# Altium PCB MainBoard-16.PcbDoc (part 1 of 2)
Units mm, origin at the board's own origin, x right, y up, seen from the top; angles counter-clockwise.
Board outline 115 x 110 mm, 2 copper layers (Top Layer, Bottom Layer); 86 components, 82 nets, 332 pads, 568 vias.
Unrouted connection lines stored in the file: 1.
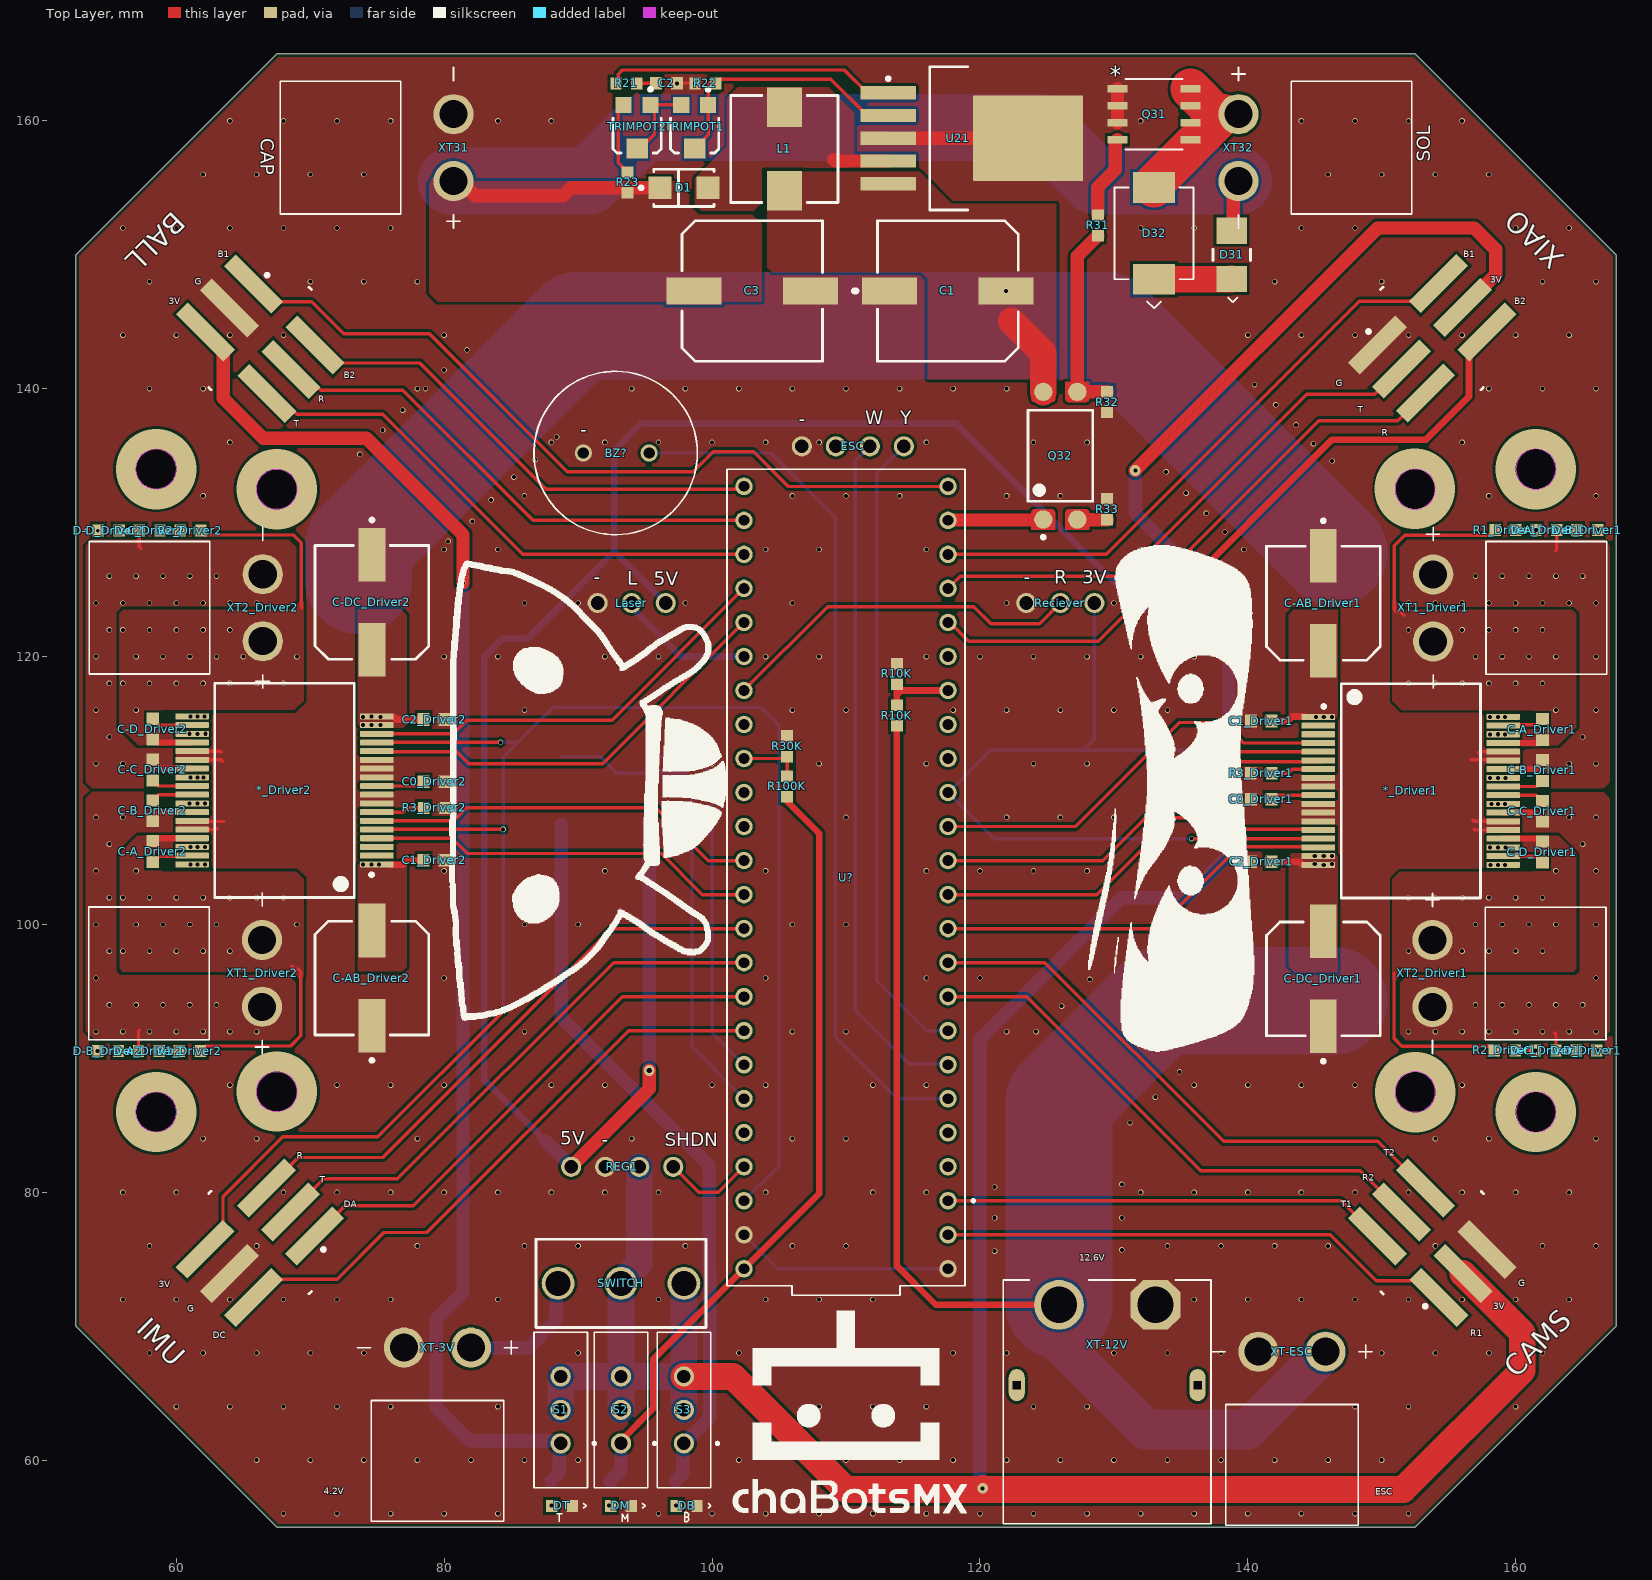
[diagram p0: Top Layer view]
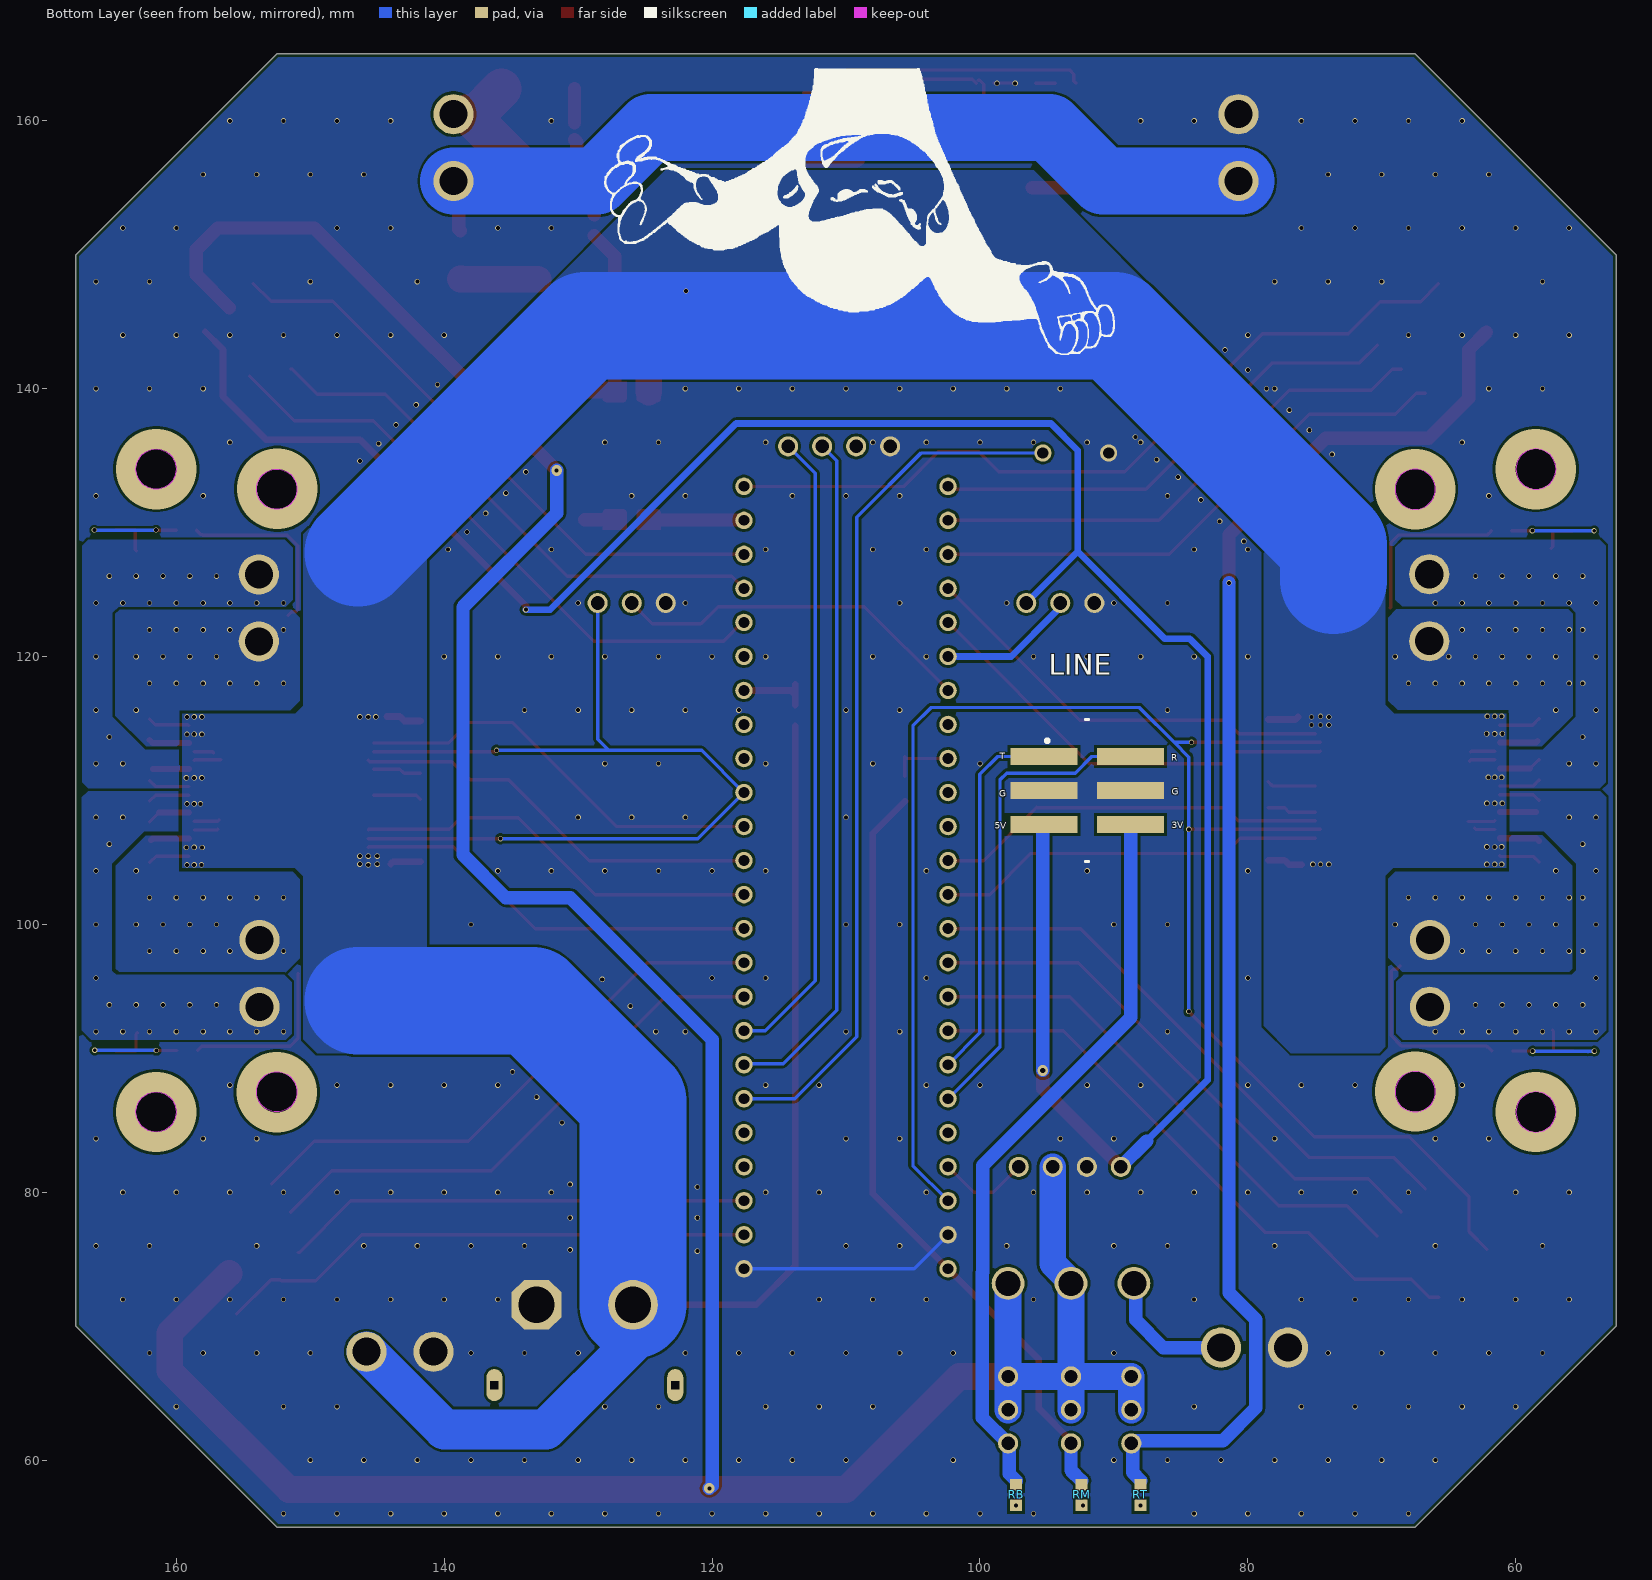
[diagram p1: Bottom Layer view, seen from below]

## Layer stack, top to bottom
Top Solder: solder mask 0.0102, Solder Resist, Dk 3.5
Top Layer: signal copper 0.0356
Dielectric 1: dielectric 0.32, FR-4, Dk 4.8
Bottom Layer: signal copper 0.0356
Bottom Solder: solder mask 0.0102, Solder Resist, Dk 3.5

## Board outline
52.5,70 52.5,150 67.5,165 152.5,165 167.5,150 167.5,70 152.5,55 67.5,55
cut-out: 151,132.5 ccw(c152.5,132.5) 152.5,131 ccw(c152.5,132.5) 154,132.5 ccw(c152.5,132.5) 152.5,134 ccw(c152.5,132.5)
cut-out: 160.015,134 ccw(c161.515,134) 161.515,132.5 ccw(c161.515,134) 163.015,134 ccw(c161.515,134) 161.515,135.5 ccw(c161.515,134)
cut-out: 160.015,86 ccw(c161.515,86) 161.515,84.5 ccw(c161.515,86) 163.015,86 ccw(c161.515,86) 161.515,87.5 ccw(c161.515,86)
cut-out: 151,87.5 ccw(c152.5,87.5) 152.5,86 ccw(c152.5,87.5) 154,87.5 ccw(c152.5,87.5) 152.5,89 ccw(c152.5,87.5)
cut-out: 67.5,131 cw(c67.5,132.5) 66,132.5 cw(c67.5,132.5) 67.5,134 cw(c67.5,132.5) 69,132.5 cw(c67.5,132.5)
cut-out: 58.485,132.5 cw(c58.485,134) 56.985,134 cw(c58.485,134) 58.485,135.5 cw(c58.485,134) 59.985,134 cw(c58.485,134)
cut-out: 67.5,86 cw(c67.5,87.5) 66,87.5 cw(c67.5,87.5) 67.5,89 cw(c67.5,87.5) 69,87.5 cw(c67.5,87.5)
cut-out: 58.485,84.5 cw(c58.485,86) 56.985,86 cw(c58.485,86) 58.485,87.5 cw(c58.485,86) 59.985,86 cw(c58.485,86)

## Design rules (kind name [scope] priority, off if disabled: settings)
BoardOutlineClearance [All] p1: gap=0.254 ignorepadtopadclearanceinfootprint=FALSE except(0: Arc-SplitContinuation Track-SplitContinuation SMDPad-SplitContinuation THPad-SplitContinuation Via-SplitContinuation Fill-SplitContinuation Poly-SplitContinuation Region-SplitContinuation Text-SplitContinuation)
Clearance [All] p1: gap=0.2 ignorepadtopadclearanceinfootprint=TRUE
PolygonConnect [All] p1: connectstyle=Direct reliefconductorwidth=0.254 reliefentries=4 polygonreliefangle="90 Angle" airgapwidth=0.254
RoomDefinition Driver2 [InComponentClass('Driver2')] p1: confinementstyle=ConfineIn formatcopy=TRUE lockcomponents=FALSE outline 80.775,130.6 52.953,130.6 52.953,89.336 80.775,89.336
RoomDefinition Driver1 [InComponentClass('Driver1')] p2: confinementstyle=ConfineIn formatcopy=TRUE lockcomponents=FALSE outline 139.475,89.388 167.291,89.388 167.291,130.653 139.475,130.653
RoutingVias [All] p1: holewidth=0.711 width=1.27 viastyle="Through Hole" minholewidth=0.711 minwidth=1.27 maxholewidth=0.711 maxwidth=1.27
SolderMaskExpansion [All] p1: expansion=0.102 istentingtop=FALSE
SupplyNets "Schematic Supply Nets_11" [InNet('TOP+3V')] p1: voltage=0.000
SupplyNets "Schematic Supply Nets_10" [InNet('BOT+3V')] p2: voltage=0.000
SupplyNets "Schematic Supply Nets_7" [InNet('+5V')] p3: voltage=0.000
SupplyNets "Schematic Supply Nets_3" [InNet('+4.2V')] p4: voltage=0.000
SupplyNets "Schematic Supply Nets_6" [InNet('MID+3V')] p5: voltage=0.000
SupplyNets "Schematic Supply Nets_5" [InNet('+3VB')] p6: voltage=0.000
SupplyNets "Schematic Supply Nets_4" [InNet('+48V')] p7: voltage=0.000
SupplyNets "Schematic Supply Nets_2" [InNet('+3V3')] p8: voltage=0.000
SupplyNets "Schematic Supply Nets_1" [InNet('GND')] p9: voltage=0.000
SupplyNets "Schematic Supply Nets" [InNet('+12V')] p10: voltage=0.000
Width [All] p1: maxlimit=10 minlimit=0.254 preferedwidth=0.254
30 further rules are at their usual default settings.

## Classes and differential pairs
component class U_OptocouplerKicker: D31 D32 Q31 Q32 R31 R32 R33 XT31 XT32
net class PWM-D[1..2]: PWM-D1 PWM-D2
net class PWM-C[1..2]: PWM-C1 PWM-C2
net class PWM-B[1..2]: PWM-B1 PWM-B2
net class PWM-A[1..2]: PWM-A1 PWM-A2
component class Main: BALL BZ? CAMS DB DM DT ESC IMU Laser LINE R10K R30K R100K RB Reciever REG1 RM RT S1 S2 S3 SWITCH U? XIAO XT-3V XT-12V XT-ESC
component class U_VoltageBooster48V: C1 C2 C3 D1 L1 R21 R22 R23 TRIMPOT1 TRIMPOT2 U21
channel class DRV8432SchDoc: Driver1 Driver2
component class Driver2: *_Driver2 C1_Driver2 C2_Driver2 C-A_Driver2 C-AB_Driver2 C-B_Driver2 C-C_Driver2 C-D_Driver2 C-DC_Driver2 D-A_Driver2 D-B_Driver2 D-C_Driver2 D-D_Driver2 R1_Driver2 R2_Driver2 R3_Driver2 XT1_Driver2 XT2_Driver2
component class Driver1: *_Driver1 C0_Driver1 C1_Driver1 C2_Driver1 C-A_Driver1 C-AB_Driver1 C-B_Driver1 C-C_Driver1 C-D_Driver1 C-DC_Driver1 D-A_Driver1 D-B_Driver1 D-C_Driver1 D-D_Driver1 R1_Driver1 R2_Driver1 R3_Driver1 XT1_Driver1 XT2_Driver1

## Components (designator, comment, footprint, x,y, rotation, side; value= is the part's Value field where it differs from the comment)
*_Driver1 "DRV8432" DRV8432 152.171,109.976 r0 top (schematic designator *)
*_Driver2 "DRV8432" DRV8432 68.073,110.012 r180 top (schematic designator *)
BALL "IDC-6PIN-SMT-2.54_1_1" IDC-6PIN-SMT-2.54 66.25,143.75 r315 top
BZ? "BUZZER-PS1240P02BT" BUZZER-PS1240P02BT 92.8,135.2 r180 top
C0_Driver1 "1UF" CAP_0603 141,109.338 r180 top (schematic designator C0)
C0_Driver2 "1UF" CAP_0603 79.245,110.65 r0 top (schematic designator C0)
C1 "EEE-HD1V101AP" FP-HDG-MFG 117.6,147.3 r0 top
C1_Driver1 "1UF" CAP_0603 141,115.188 r0 top (schematic designator C1)
C1_Driver2 "1UF" CAP_0603 79.245,104.8 r180 top (schematic designator C1)
C2 "1UF" CAP_0603 96.6,162.8 r180 top
C2_Driver1 "1UF" CAP_0603 141,104.688 r0 top (schematic designator C2)
C2_Driver2 "1UF" CAP_0603 79.245,115.3 r180 top (schematic designator C2)
C3 "EEE-TG1J101UP" FP-TGG-MFG 103,147.3 r180 top
C-A_Driver1 "1UF" CAP_0603 162,114.548 r270 top (schematic designator C-A)
C-A_Driver2 "1UF" CAP_0603 58.245,105.44 r90 top (schematic designator C-A)
C-AB_Driver1 "EEEFT1E471AP" FP-FTF-MFG 145.641,123.988 r270 top (schematic designator C-AB)
C-AB_Driver2 "EEEFT1E471AP" FP-FTF-MFG 74.603,96 r90 top (schematic designator C-AB)
C-B_Driver1 "1UF" CAP_0603 162,111.5 r90 top (schematic designator C-B)
C-B_Driver2 "1UF" CAP_0603 58.245,108.488 r270 top (schematic designator C-B)
C-C_Driver1 "1UF" CAP_0603 162,108.452 r270 top (schematic designator C-C)
C-C_Driver2 "1UF" CAP_0603 58.245,111.536 r90 top (schematic designator C-C)
C-D_Driver1 "1UF" CAP_0603 162,105.404 r90 top (schematic designator C-D)
C-D_Driver2 "1UF" CAP_0603 58.245,114.584 r270 top (schematic designator C-D)
C-DC_Driver1 "EEEFT1E471AP" FP-FTF-MFG 145.641,95.938 r90 top (schematic designator C-DC)
C-DC_Driver2 "EEEFT1E471AP" FP-FTF-MFG 74.603,124.05 r270 top (schematic designator C-DC)
CAMS "IDC-6PIN-SMT-2.54_1_1" IDC-6PIN-SMT-2.54 153.776,76.224 r135 top
D1 "SS14-E3/61T" FP-95400-MFG 97.9,155 r0 top
D31 "DIO_BZG05C3V3" DIO_BZG05C3V3 138.8,150 r270 top
D32 "DIO_RS3B-13-F" DIO_RS3B-13-F 133.2,152 r270 top
D-A_Driver1 "LED_0603" LED_0603 162.291,129.438 r180 top (schematic designator D-A)
D-A_Driver2 "LED_0603" LED_0603 57.953,90.55 r0 top (schematic designator D-A)
D-B_Driver1 "LED_0603" LED_0603 165.341,129.438 r180 top (schematic designator D-B)
D-B_Driver2 "LED_0603" LED_0603 54.903,90.55 r0 top (schematic designator D-B)
D-C_Driver1 "LED_0603" LED_0603 162.241,90.588 r0 top (schematic designator D-C)
D-C_Driver2 "LED_0603" LED_0603 58.003,129.4 r180 top (schematic designator D-C)
D-D_Driver1 "LED_0603" LED_0603 165.291,90.588 r0 top (schematic designator D-D)
D-D_Driver2 "LED_0603" LED_0603 54.953,129.4 r180 top (schematic designator D-D)
DB "LED_0603" LED_0603 98.1,56.6 r0 top
DM "LED_0603" LED_0603 93.2,56.6 r0 top
DT "LED_0603" LED_0603 88.8,56.6 r0 top
ESC "4PIN" 4PIN 110.5,135.7 r180 top
IMU "IDC-6PIN-SMT-2.54_1_1" IDC-6PIN-SMT-2.54 66.25,76.25 r225 top
L1 "100UH" IND_Boost 105.4,157.9 r90 top
Laser "3PIN" 3PIN 94,124 r180 top
LINE "IDC-6PIN-SMT-2.54_1_1" IDC-6PIN-SMT-2.54 92,110 r180 bottom
Q31 "SQ4470EY-T1_GE3" SQ4470EY-T1_GE3 133,160.5 r0 top
Q32 "SFH6156-1T" FP-83911-MFG 126,135 r90 top
R1_Driver1 "4.7KΩ" RES_0603 159.241,129.438 r180 top (schematic designator R1)
R1_Driver2 "4.7KΩ" RES_0603 61.003,90.55 r0 top (schematic designator R1)
R2_Driver1 "4.7KΩ" RES_0603 159.191,90.588 r0 top (schematic designator R2)
R2_Driver2 "4.7KΩ" RES_0603 61.053,129.4 r180 top (schematic designator R2)
R3_Driver1 "10KΩ" RES_0603 141,111.288 r180 top (schematic designator R3)
R3_Driver2 "10KΩ" RES_0603 79.245,108.7 r0 top (schematic designator R3)
R10K "10KΩ" RES_0603 113.8,115.6 r90 top
R10K "10KΩ" RES_0603 113.8,118.7 r90 top
R21 "2.94KΩ" RES_0603 93.6,162.8 r180 top
R22 "1.5KΩ" RES_0603 99.5,162.8 r0 top
R23 "30KΩ" RES_0603 93.7,155.4 r270 top
R30K "10KΩ" RES_0603 105.6,113.3 r90 top
R31 "10KΩ" RES_0603 128.8,152.2 r90 top
R32 "10KΩ" RES_0603 129.5,139 r90 top
R33 "1KΩ" RES_0603 129.5,131 r270 top
R100K "10KΩ" RES_0603 105.6,110.3 r90 top
RB "110Ω" RES_0603 97.3,57.4 r270 bottom
Reciever "3PIN" 3PIN 126,124 r180 top
REG1 "U1V11F5" U1V11F5 93.28,81.9 r180 top
RM "110Ω" RES_0603 92.4,57.4 r270 bottom
RT "110Ω" RES_0603 88,57.4 r270 bottom
S1 "EG1218" EG1218 88.65,63.75 r90 top
S2 "EG1218" EG1218 93.15,63.75 r90 top
S3 "EG1218" EG1218 97.85,63.75 r90 top
SWITCH "Slide Switch 6A" "Slide Switch 6A" 93.2,73.2 r90 top
TRIMPOT1 "TC33X-2-103E" BOUR-TC33X-2_V 98.7,159.4 r270 top
TRIMPOT2 "TC33X-2-103E" BOUR-TC33X-2_V 94.4,159.4 r270 top
U21 "LM2587SX-ADJ/NOPB" KTT0005B_N 119.4,158.7 r0 top
U? "Teensy-4.1-TH" Teensy-4.1-TH 110,103.5 r90 top
XIAO "IDC-6PIN-SMT-2.54_1_1" IDC-6PIN-SMT-2.54 153.75,143.75 r45 top
XT1_Driver1 "XT30_PW_M" XT30_PW_M 163.841,123.638 r270 top (schematic designator XT1)
XT1_Driver2 "XT30_PW_M" XT30_PW_M 56.403,96.35 r90 top (schematic designator XT1)
XT2_Driver1 "XT30_PW_M" XT30_PW_M 163.791,96.338 r270 top (schematic designator XT2)
XT2_Driver2 "XT30_PW_M" XT30_PW_M 56.453,123.65 r90 top (schematic designator XT2)
XT31 "CAPACITOR" XT30_PW_M 70.7,158 r90 top
XT32 "SOLENOID" XT30_PW_M 149.3,158 r270 top
XT-3V "XT30_PW_M" XT30_PW_M 79.5,58.4 r180 top
XT-12V "XT60PW" XT60PW 129.5,65.6 r0 top
XT-ESC "XT30_PW_M" XT30_PW_M 143.3,58.1 r180 top

## Footprints (in the part's own frame and the unit in brackets; to place one, negate y for a bottom-side part, rotate by r counter-clockwise, add the part's x,y. Pads: shape width x height; smd on the part's side, far side on the other; paste and mask are expansions set on the pad)
3PIN [mm]
  round 1.5 hole 1.02: 1(-2.54,0) 2(0,0) 3(2.54,0)
4PIN [mm]
  round 1.5 hole 1.02: 1(-3.82,0) 2(-1.28,0) 3(1.26,0) 4(3.8,0)
BOUR-TC33X-2_V [mm] "SMD, 3-Leads, Body 3.8x3.6mm"
  rect 1.2x1.2 smd: 1(-1.8,1) 3(-1.8,-1)
  rect 1.5x1.6 smd: 2(1.45,0)
  silkscreen extent -3.07,-1.8 1.8,1.8, body extent -2,-1.8 1.96,1.8, height 1.15
BUZZER-PS1240P02BT [mm]
  round 1.28 hole 0.85: 1(-2.5,0) 2(2.413,0)
  silkscreen extent -6.1,-6.1 6.1,6.1, body extent -6.14,-6.04 6.06,6.16, height 6
CAP_0603 [mm] "Chip Capacitor, 2-Leads, Body 1.60x0.80mm, IPC Medium Density"
  rect 0.9x0.95 smd: 1(-0.775,0) 2(0.775,0)
  body extent -0.85,-0.45 0.85,0.45, height 0.55
DIO_BZG05C3V3 [mm] "Molded Diode, 2-Leads, Body 4.35x2.50mm, IPC Medium Density"
  rect 1.95x2.25 smd: A(-1.8,0) C(1.8,0)
  silkscreen extent -0.42,-1.4 3.54,1.4, body extent -2.25,-1.4 2.25,1.4, height 2.3
DIO_RS3B-13-F [mm]
  rect 2.29x3.12 smd: A(-3.03,-0.2) C(3.83,-0.2)
  silkscreen extent -3.03,-3.15 6,2.75, body extent -3.67,-3.31 4.46,2.91, height 2.45
DRV8432 [mm]
  rrect22% 2.5x0.45 smd: 1(-6.9,5.525) 2(-6.9,4.875) 3(-6.9,4.225) 4(-6.9,3.575) 5(-6.9,2.925) 6(-6.9,2.275) 7(-6.9,1.625) 8(-6.9,0.975) 9(-6.9,0.325) 10(-6.9,-0.325) 11(-6.9,-0.975) 12(-6.9,-1.625) 13(-6.9,-2.275) 14(-6.9,-2.925) 15(-6.9,-3.575) 16(-6.9,-4.225) 17(-6.9,-4.875) 18(-6.9,-5.525) 19(6.9,-5.525) 20(6.9,-4.875) 21(6.9,-4.225) 22(6.9,-3.575) 23(6.9,-2.925) 24(6.9,-2.275) 25(6.9,-1.625) 26(6.9,-0.975) 27(6.9,-0.325) 28(6.9,0.325) 29(6.9,0.975) 30(6.9,1.625) 31(6.9,2.275) 32(6.9,2.925) 33(6.9,3.575) 34(6.9,4.225) 35(6.9,4.875) 36(6.9,5.525)
  silkscreen extent -6.62,-8 5.2,8, body extent -7.1,-7.95 7.1,7.95, height 3.6
EG1218 [mm]
  round 1.508 hole 1: 1(-2.5,-0.05) 2(0,-0.05) 3(2.5,-0.05)
  silkscreen extent -5.8,-2.65 5.8,1.95, body extent -5.8,-2.05 5.8,1.95, height 7
FP-83911-MFG [mm]
  round 1.368 smd paste+0 mask+0: 1(-4.765,1.27) 2(-4.765,-1.27) 3(4.765,-1.27) 4(4.765,1.27)
  Top Layer region: 5.525,0.38 4.255,0.38 4.159,0.399 4.078,0.453 4.024,0.534 4.005,0.63 4.005,0.63 4.005,1.91 4.024,2.006 4.078,2.087 4.159,2.141 4.255,2.16 4.255,2.16 5.525,2.16
  Top Layer region: -5.525,2.16 -4.255,2.16 -4.159,2.141 -4.078,2.087 -4.024,2.006 -4.005,1.91 -4.005,1.91 -4.005,0.63 -4.038,0.505 -4.13,0.413 -4.255,0.38 -4.255,0.38 -5.525,0.38
  Top Layer region: -5.525,-0.38 -4.255,-0.38 -4.159,-0.399 -4.078,-0.453 -4.024,-0.534 -4.005,-0.63 -4.005,-0.63 -4.005,-1.91 -4.024,-2.006 -4.078,-2.087 -4.159,-2.141 -4.255,-2.16 -4.255,-2.16 -5.525,-2.16
  Top Layer region: 5.525,-2.16 4.255,-2.16 4.159,-2.141 4.078,-2.087 4.024,-2.006 4.005,-1.91 4.005,-1.91 4.005,-0.63 4.024,-0.534 4.078,-0.453 4.159,-0.399 4.255,-0.38 4.255,-0.38 5.525,-0.38
  silkscreen extent -6.2,-2.41 3.4,2.41, body extent -4.91,-2.34 4.91,2.34, height 4.06
FP-95400-MFG [mm]
  rect 1.7x1.68 smd paste+0 mask+0: 1(-1.79,0) 2(1.79,0)
  silkscreen extent -3.32,-1.4 2.25,1.4, body extent -2.74,-1.5 2.74,1.5, height 0.25
FP-FTF-MFG [mm]
  rect 4x2 smd paste+0 mask+0: 1(-3.55,0) 2(3.55,0)
  silkscreen extent -6.27,-4.25 4.25,4.25, body extent -5.8,-4.5 5.8,4.5, height 0.25
FP-HDG-MFG [mm]
  rect 4.1x2 smd paste+0 mask+0: 1(-4.35,0) 2(4.35,0)
  silkscreen extent -7.1,-5.25 5.25,5.25, body extent -6.65,-5.5 6.65,5.5, height 0.25
FP-TGG-MFG [mm]
  rect 4.1x2 smd paste+0 mask+0: 1(-4.35,0) 2(4.35,0)
  silkscreen extent -7.88,-5.25 5.25,5.25, body extent -6.65,-5.5 6.65,5.5, height 0.25
IDC-6PIN-SMT-2.54 [mm] "SOJ, 6-Leads, Body 10.60x10.50mm, Pitch 2.54mm, IPC Low Density"
  rect 5x1.25 smd: 1(-3.225,2.54) 2(-3.225,0) 3(-3.225,-2.54) 4(3.25,-2.54) 5(3.25,0) 6(3.25,2.54)
  silkscreen extent -3.1,-5.3 0.12,5.3, body extent -5.1,-7.61 5.08,7.61, height 10.5
IND_Boost [mm] "Precision Wire Wound Inductor, 2-Leads, Body 7.75x7.75mm, IPC Medium Density"
  rect 2.95x2.6 smd: 1(-3.1,0) 2(3.1,0)
  silkscreen extent -4,-4 4,4, body extent -3.98,-3.88 3.98,3.88, height 4.6
KTT0005B_N [mm] "DPAK, 5-Leads, Body 10.65x9.65mm, Pitch 1.7mm, IPC Medium Density"
  rrect10% 4.15x1 smd: 1(-6.25,3.4) 2(-6.25,1.7) 3(-6.25,0) 4(-6.25,-1.7) 5(-6.25,-3.4)
  rrect2% 8.2x6.4 smd: 6(4.2,0)
  silkscreen extent -6.37,-5.35 -0.3,5.35, body extent -3.15,-5.32 6.5,5.33, height 4.83
LED_0603 [mm]
  rect 0.85x0.9 smd: A(-0.776,-0.009) C(0.774,-0.009)
  silkscreen extent 1.6,-0.2 1.8,0.2, body extent -0.8,-0.4 0.8,0.4, height 0.35
RES_0603 [mm] "Chip Resistor, 2-Leads, Body 1.60x0.80mm, IPC Medium Density"
  rect 0.85x0.9 smd: 1(-0.775,0) 2(0.775,0)
  body extent -0.85,-0.45 0.85,0.45, height 0.55
"Slide Switch 6A" [mm]
  round 2.45 hole 1.85: 1(0,4.7) 2(0,0) 3(0,-4.7)
  silkscreen extent -3.3,-6.35 3.3,6.35, body extent -3.3,-6.35 3.3,6.35, height 13.33
SQ4470EY-T1_GE3 [mil]
  rect 57.5x22 smd paste+0 mask+0: D(107.17,-75.43) D(107.17,-25.43) D(107.17,24.57) D(107.17,74.57) G(-107.33,-75.43) S(-107.33,-25.43) S(-107.33,24.57) S(-107.33,74.57)
  silkscreen extent -84,-104 83,103, body extent -122,-99 122,98, height 69
Teensy-4.1-TH [mm]
  round 1.308 hole 0.8: 0(-26.67,-7.62) 1(-24.13,-7.62) 2(-21.59,-7.62) 3(-19.05,-7.62) 3V(-24.13,7.62) 3V-1(6.35,-7.62) 4(-16.51,-7.62) 5(-13.97,-7.62) 6(-11.43,-7.62) 7(-8.89,-7.62) 8(-6.35,-7.62) 9(-3.81,-7.62) 10(-1.27,-7.62) 11(1.27,-7.62) 12(3.81,-7.62) 13(3.81,7.62) 14(1.27,7.62) 15(-1.27,7.62) 16(-3.81,7.62) 17(-6.35,7.62) 18(-8.89,7.62) 19(-11.43,7.62) 20(-13.97,7.62) 21(-16.51,7.62) 22(-19.05,7.62) 23(-21.59,7.62) 24(8.89,-7.62) 25(11.43,-7.62) 26(13.97,-7.62) 27(16.51,-7.62) 28(19.05,-7.62) 29(21.59,-7.62) 30(24.13,-7.62) 31(26.67,-7.62) 32(29.21,-7.62) 33(29.21,7.62) 34(26.67,7.62) 35(24.13,7.62) 36(21.59,7.62) 37(19.05,7.62) 38(16.51,7.62) 39(13.97,7.62) 40(11.43,7.62) 41(8.89,7.62) GND(-26.67,7.62) GND1(-29.21,-7.62) GND3(6.35,7.62) VIN(-29.21,7.62)
  silkscreen extent -31.18,-9.6 30.48,8.89, body extent -31.7,-8.9 30.73,8.88, height 15.02
U1V11F5 [mm]
  round 1.5 hole 1.02: GND(1.26,0) SHDN(-3.82,0) VIN(-1.28,0) VOUT(3.8,0)
  body extent -5.78,-1.34 5.68,4.95, height 18.12
XT30_PW_M [mm]
  round 3 hole 2.1: N(2.5,-10) P(-2.5,-10)
  silkscreen extent -6,-10.5 6,2.95, body extent -4.95,-11 4.95,2.95, height 5
XT60PW [mm]
  oct 3.716x3.716 hole 2.7 mask+0.102: N(3.6,6)
  round 3.716 hole 2.7 mask+0.102: P(-3.6,6)
  oval 1.2x2.4 hole 0.6 square mask+0.102: SH1(-6.75,0) SH2(6.75,0)
  silkscreen extent -7.75,-10.35 7.75,7.85, body extent -7.75,-10.35 7.75,7.85, height 8.4

## Part data
C0_Driver1 C0_Driver2 C1_Driver1 C1_Driver2 C2 C2_Driver1 C2_Driver2 C-A_Driver1 C-A_Driver2 C-B_Driver1 C-B_Driver2 C-C_Driver1 C-C_Driver2 C-D_Driver1 C-D_Driver2: library part CAP_0603, "Capacitor SMD 0603 generic"
C1: library part CMP-00287-42869300-1, "EEE-HD1V101AP Aluminum Electrolytic Capacitor, 100 uF, 35 V, ± 20%, 5000 hours @ 105°C, Radial Can - SMD", Capacitance=100µF, Case/Package=Radial, Dielectric Material=Aluminium, ESR (Equivalent Series Resistance)=800mΩ, Leakage Current=35µA, Max Operating Temperature=105°C, Min Operating Temperature=-40°C, Ripple Current=101mA, Tolerance=20%, Voltage=35V, Diameter=10mm, Dissipation Factor=14%, Height=10.2mm, Height - Seated (Max)=10.2108mm, Impedance=800mΩ, Lead Free="Lead Free", Lead Pitch=4.6mm, Length=10.5mm, Life (Hours)=5000hours, Lifecycle Status=Production, Mount="PCB, Surface Mount", NexarPartId=42869300, Number of Pins=2, Packaging="Cut Tape", Radiation Hardening=No, REACH SVHC="No SVHC", Ripple Current (AC)=101mA, RoHS=Compliant, Schedule B="8532220020, 8532220020", Termination=SMD/SMT, Voltage Rating=35V, Voltage Rating (DC)=35V
C3: library part CMP-05427-002169-1, "CAP ALUM 100UF 20% 63V SMD", Capacitance=100uF, Case/Package=Radial, ESR (Equivalent Series Resistance)=800mR, Max Operating Temperature=125°C, Min Operating Temperature=-40°C, Package Quantity=500, Ratings=AEC-Q200, Ripple Current=150mA, Tolerance=20%, Voltage=63V, Construction=Cylindrical, Contact Plating=Tin, Diameter=10mm, Dissipation Factor=0.12%, Height=10.2mm, Height - Seated (Max)=0.402inch, Lead Free="Lead Free", Length=10.2mm, Life (Hours)=2000Hour, Mount="Surface Mount", Packaging="Tape and Reel", Radiation Hardening=No, Reach SVHC Compliant=Yes, Ripple Current (AC)=150mA, RoHS Compliant=Yes, Series=TG, Termination=SMD/SMT, Voltage Rating=63V, Voltage Rating (DC)=63V, Width=900um
C-AB_Driver1 C-AB_Driver2 C-DC_Driver1 C-DC_Driver2: library part CMP-05427-000040-1, "CAP ALUM 470UF 20% 25V SMD", Capacitance=470uF, Case/Package=Radial, Dielectric Material=Aluminium, ESR (Equivalent Series Resistance)=80mR, Leakage Current=117.5uA, Max Operating Temperature=105°C, Min Operating Temperature=-55°C, Package Quantity=500, Ripple Current=850mA, Tolerance=20%, Voltage=25V, Construction=Cylindrical, Contact Plating=Tin, Diameter=8mm, Features="General Purpose", Height=10.2mm, Height - Seated (Max)=0.413inch, Lead Diameter=0.9mm, Lead Free="Lead Free", Lead Pitch=3.1mm, Length=10.2mm, Life (Hours)=2000Hour, Mount="Surface Mount", Number of Pins=2, Packaging="Tape and Reel", Radiation Hardening=No, REACH SVHC="No SVHC", Ripple Current (AC)=850mA, RoHS Compliant=Yes, Series=FT, Termination=SMD/SMT, Voltage Rating=25V, Voltage Rating (DC)=25V
D1: library part CMP-02539-000035-1, "DIODE SCHOTTKY 40V 1A DO214AC", Forward Current=1A, Manufacturer=Vishay, Max Junction Temp=+150°C, Max Repetitive Reverse Voltage=40V, Max Surge Forward Current=40A, Package=95400, Peak Reverse Current=0.2mA, Temperature="-65°C to +150°C", Temperature Range Low=-65°C, Automotive=No, Category=Diode, ComponentLink2Description=Datasheet, ComponentLink2URL=http://www.vishay.com/docs/88746/ss12.pdf, Device Class L1="Discrete Semiconductors", Device Class L2=Diodes, Device Class L3="Schottky Diodes", Digikey Description="DIODE SCHOTTKY 40V 1A DO214AC", Footprint Url=http://www.vishay.com/docs/95400/sma.pdf, Height=2.29mm, Lead Free=Yes, Manufacturer Part Number=SS14-E3/61T, Mouser Description="SS14 Series 40 V 1 A Surface Mount Schottky Barrier Rectifier - DO-214AC (SMA)", Octopart=https://octopart.com/ss14-e3%2F61t-vishay-39552847, RoHS=TRUE, Standoff Height=0mm, Temperature Range High=+150°C
ESC Laser Reciever: "2.54 Header"
L1: library part "Boost Inductor", "Voltage Boost Inductor"
Q32: library part CMP-00030-03895371-1, "SFH6156-1T Optocoupler Dc-in 1-CH Transistor Dc-out 4-PIN PDIP SMD T/r", Ambient Temperature Range High=100°C, Case/Package=SMD/SMT, Collector Emitter Saturation Voltage=400mV, Collector Emitter Voltage (VCEO)=70V, Current Transfer Ratio=80%, Forward Current=60mA, Forward Voltage=1.25V, Isolation Voltage=5.3kV, Max Collector Current=100mA, Max Power Dissipation=150mW, Min Operating Temperature=-55°C, Output Current per Channel=50mA, Reverse Breakdown Voltage=6V, Fall Time=11s, Height=4.059mm, Input Current=60mA, Lead Free="Lead Free", Max Input Current=60mA, Max Operating Temperature=100°C, Max Output Voltage=70V, Mount="PCB, Surface Mount", NexarPartId=3895371, Number of Channels=1, Number of Elements=1, Number of Pins=4, Output Voltage=70V, Packaging=Digi-Reel®, Power Dissipation=150mW, Radiation Hardening=No, Reverse Voltage=6V, Rise Time=2s, RoHS=Compliant, Schedule B="8541408000, 8541408000", Turn-Off Delay Time=2.3µs, Turn-On Delay Time=3µs
R1_Driver1 R1_Driver2 R2_Driver1 R2_Driver2 R3_Driver1 R3_Driver2 R10K R10K R21 R22 R23 R30K R31 R32 R33 R100K RB RM RT: library part RES_0603, "Resistor SMD 0603 generic"
TRIMPOT1 TRIMPOT2: library part CMP-2100-03695-1, "Trimming Potentiometer, 10000 Ohm, -40 to 100 degC, 3-Pin SMD, RoHS, Tape and Reel", Case/Package=SMD/SMT, Colour=Silver, Manufacturer=Bourns, Max Operating Temperature=100degC, Max Power Dissipation=100mW, Min Operating Temperature=-40degC, Package Description="3-Pin Surface Mount Device, Body 3.8 x 3.6 mm", Package Quantity=2500, Package Reference=TC33X-2, Resistance=10KOhm, Temperature Coefficient=250ppm/degreesC, Tolerance=25%, Voltage Rating (DC)=50V, Composition=Potentiometer, Contact Plating=Silver, Datasheet URL=http://www.bourns.com/docs/Product-Datasheets/TC33.pdf, Datasheet Version=42583.0, Depth=3.8mm, Height=0.047inch, Lead Free=LeadFree, Length=3mm, Manufacturer URL=http://www.bourns.com/, Military Standard=Not, Mount=SurfaceMount, Number of Turns=1, Packaging=TapeandReel, Power Rating=100mW, Radiation Hardening=No, REACH SVHC=NoSVHC, RoHSCompliant=true, Taper=Linear, Termination=FootPrint, Weight=29.4mg, Width=0.118inch
U21: library part CMP-0069-00069-3, "5A Flyback Regulator, 5-pin TO-263, Pb-Free", Manufacturer="Texas Instruments", PackageTopMarking="NSUZXYTTE#*LM2587S*-ADJ P+", PowerWise=N, Code_JEDEC=MO-169-AB, ComponentLink1Description="Datasheet URL", ComponentLink1URL=http://www.ti.com/general/docs/lit/getliterature.tsp?genericPartNumber=LM2587&fileType=pdf, CompType=Switcher, PackageDescription="TO-263, Molded, .400 x .390 x .180in, 5 Lead, .067in Pitch, Surface Mount", PackageReference=KTT0005B, PinCount=5, RoHS=Y
XT31 XT32: library part XT30_PW_M

## Via types
v1: diameter 0.4, hole 0.3, Top Layer to Bottom Layer, tented both sides, 552 vias
v2: diameter 6, hole 3, Top Layer to Bottom Layer, 8 vias
v3: diameter 0.5, hole 0.3, Top Layer to Bottom Layer, 3 vias
v4: diameter 0.4, hole 0.256, Top Layer to Bottom Layer, tented both sides, 2 vias
v5: diameter 0.8, hole 0.3, Top Layer to Bottom Layer, tented both sides, 2 vias
v6: diameter 0.8, hole 0.4, Top Layer to Bottom Layer, tented both sides, 1 vias

## Nets (pads, with @x,y where several pads share a name; then routed paths per layer and width w, separated by ;. In a path a pad name is that pad's centre, name@x,y a point inside that pad or via, vN(x,y) a via of type N, cw(c..) or ccw(c..) an arc to the next point about the centre after c; other vN are vias at no path point)
4IN: R30K.1 R100K.2 U?.41 | length 4.7
  Top Layer w0.254: U?.41@102.38,112.39 105.465,112.39 R30K.1@105.6,112.525 R100K.2@105.6,111.075
12IN: R10K.1@113.8,117.925 R10K.2@113.8,116.375 U?.26 | length 5.5
  Top Layer w0.5: R10K.2@113.8,116.375 113.8,117.15 ; R10K.1@113.8,117.925 113.8,117.15 ; U?.26@117.62,117.47 114.12,117.47 113.8,117.15
+3V3: *_Driver1.5 *_Driver1.15 *_Driver2.5 *_Driver2.15 IMU.4 Reciever.1 U?.3V U?.3V-1 | length 200
  Top Layer w0.254: IMU.4@62.156,75.748 63.482,77.074 63.482,79.682 67.944,84.144 75.044,84.144 v1(84.4,93.5) ; *_Driver2.5@74.58,107.093 84.393,107.093 v1(84.4,107.1) ; *_Driver2.15@74.58,113.593 84.193,113.593 v1(84.2,113.6) ; v1(135.8,106.4) *_Driver1.15@145.671,106.401 ; v1(136.1,113) 136.14,113 136.238,112.901 *_Driver1.5@145.271,112.901
  Bottom Layer w0.254: v1(84.2,113.6) 85.5,113.6 ; v1(84.4,93.5) v1(84.4,107.1) 84.4,112.5 85.5,113.6 ; U?.3V@102.38,79.37 105,81.99 105,114.851 103.651,116.2 88.1,116.2 85.5,113.6 ; Reciever.1@128.54,124 128.54,113.84 127.7,113 ; v1(135.8,106.4) 121.07,106.4 U?.3V-1@117.62,109.85 120.77,113 127.7,113 ; v1(136.1,113) 127.7,113
+3VB: CAMS.2 REG1.VIN S1.2 S1.3 S2.2 S2.3 S3.2 S3.3 SWITCH.2 SWITCH.3 XIAO.5 | length 248.7
  Top Layer w1: v5(131.6,133.9) 149.7,152 156.9,152 158.5,150.4 158.5,148.5 XIAO.5@156.048,146.048
  Top Layer w2: S3.3@97.9,66.25 101.55,66.25 110,57.8 120.1,57.8 v5(120.2,57.9) 120.3,57.8 151.6,57.8 160.5,66.7 160.5,69.5 CAMS.2@156.057,73.943
  Bottom Layer w1: v5(120.2,57.9) 120,58.1 120,91.4 130.6,102 135.4,102 138.6,105.2 138.6,123.7 131.6,130.7 v5(131.6,133.9)
  Bottom Layer w2: S1.2@88.7,63.75 S1.3@88.7,66.25 S2.3@93.2,66.25 ; S2.2@93.2,63.75 S2.3@93.2,66.25 ; REG1.VIN@94.56,81.9 94.56,74.682 93.2,73.322 S2.3@93.2,66.25 ; S3.2@97.9,63.75 S3.3@97.9,66.25 ; SWITCH.3@97.9,73.2 S3.3@97.9,66.25 ; S2.3@93.2,66.25 S3.3@97.9,66.25
+4.2V: SWITCH.1 XT-3V.P | length 10.8
  Bottom Layer w1: XT-3V.P@81.222,68.4 86.3,68.4 88.375,70.475 88.375,73.075 SWITCH.1@88.5,73.2
+5V: Laser.1 LINE.3 REG1.VOUT XIAO.4 | length 177.3
  Top Layer w0.5: v1(133.9,123.5) 133.9,123.8 146.3,136.2 153.3,136.2 156.518,139.418 156.518,142.926 XIAO.4@157.844,144.252
  Top Layer w1: REG1.VOUT@89.48,81.9 95.3,87.72 v6(95.3,89.1)
  Bottom Layer w0.5: 87.55,83.83 83,88.38 83,120 84.325,121.325 86.185,121.325 92.7,127.84 ; Laser.1@96.54,124 92.7,127.84 ; v1(133.9,123.5) 132.1,123.5 118.2,137.4 94.7,137.4 92.7,135.4 92.7,127.84
  Bottom Layer w1: 87.55,83.83 REG1.VOUT@89.48,81.9 ; LINE.3@95.225,107.46 95.3,107.385 v6(95.3,89.1)
+12V: *_Driver1.1 *_Driver1.17 *_Driver1.18 *_Driver1.19 *_Driver1.21 *_Driver1.26 *_Driver1.29 *_Driver1.34 *_Driver1.36 *_Driver2.1 *_Driver2.17 *_Driver2.18 *_Driver2.19 *_Driver2.21 *_Driver2.26 *_Driver2.29 *_Driver2.34 *_Driver2.36 C1.2 C1_Driver1.2 C1_Driver2.2 C2_Driver1.2 C2_Driver2.2 C-AB_Driver1.2 C-AB_Driver2.2 C-DC_Driver1.2 C-DC_Driver2.2 L1.1 Q32.4 R10K.1@113.8,114.825 U21.5 XT-12V.P XT-ESC.P | length 225.7
  Top Layer w0.5: *_Driver2.1@75.973,104.462 76.932,104.462 77.27,104.8 C1_Driver2.2@78.47,104.8 ; 76.245,115.488 76.433,115.3 C2_Driver2.2@78.47,115.3 ; R10K.1@113.8,114.825 113.8,74.5 116.7,71.6 XT-12V.P@125.9,71.6 ; C2_Driver1.2@141.775,104.688 143.812,104.688 144,104.5 ; C1_Driver1.2@141.775,115.188 142.975,115.188 143.313,115.526 *_Driver1.1@144.271,115.526
  Top Layer w2: 122.34,145.06 124.73,142.67 Q32.4@124.73,139.765
  Bottom Layer w3: XT-12V.P@125.9,71.6 126.037,71.463 126.037,68.663 132.4,62.3 140,62.3 XT-ESC.P@145.8,68.1
  Bottom Layer w8: 73.6,125.7 73.6,128.341 89.959,144.7 129.5,144.7 146.45,127.75 ; XT-12V.P@125.9,71.6 125.9,86.8 133.4,94.3 146.442,94.3
  other v1: 145.671,104.451 158.125,104.45 158.671,104.451 159.2,104.45 61.045,104.487 61.573,104.487 62.145,104.488 73.945,104.488 74.573,104.487 75.145,104.488 145,104.5 146.3,104.5 145,105.1 145.671,105.101 146.3,105.1 158.075,105.75 158.671,105.751 159.25,105.75 61.045,105.788 61.573,105.787 62.145,105.788 158.2,109 158.671,109.001 159.2,109 60.995,109.038 61.573,109.037 62.145,109.038 158.1,110.95 158.671,110.951 159.25,110.95 61.045,110.988 61.573,110.987 62.045,110.988 158.1,114.2 158.671,114.201 159.2,114.2 60.995,114.238 61.573,114.237 62.17,114.238 73.945,114.888 74.573,114.887 75.245,114.888 73.945,115.488 75.245,115.488 145.1,115.5 145.671,115.501 146.3,115.5 158.1,115.5 158.671,115.501 159.2,115.501 61.045,115.538 61.573,115.537 62.12,115.538 74.573,115.537 121.95,147.3
+48V: C3.2 D1.1 D31.A R23.2 XT31.P XT32.N | length 82
  Top Layer w1: XT31.P@80.7,155.5 81.2,155.5 82.3,154.4 88.9,154.4 89.496,154.996 96.106,154.996 D1.1@96.11,155 ; D31.A@138.8,151.8 138.9,151.9 138.9,155.4 XT32.N@139,155.5
  Bottom Layer w5: XT31.P@80.5,155.5 90.8,155.5 94.8,159.5 124.6,159.5 128.6,155.5 XT32.N@139.3,155.5
BALL-RX: BALL.5 U?.34 | length 38.5
  Top Layer w0.254: BALL.5@68.548,141.452 69.228,141.452 70.78,139.9 76.9,139.9 86.63,130.17 U?.34@102.38,130.17
BALL-TX: BALL.4 U?.35 | length 40.6
  Top Layer w0.254: BALL.4@66.752,139.656 67.428,139.656 68.984,138.1 75.4,138.1 85.87,127.63 U?.35@102.38,127.63
BOT+3V: LINE.4 RB.1 S3.1 | length 54.6
  Bottom Layer w1: LINE.4@88.75,107.46 88.75,93.05 99.8,82 99.8,74.022 99.825,73.997 99.825,63.175 S3.1@97.9,61.25 97.821,61.171 97.821,58.996 RB.1@97.3,58.475
BUTTON-1: BALL.1 U?.32 | length 59.2
  Top Layer w0.254: BALL.1@65.766,147.826 67.091,146.501 70.099,146.501 72.5,144.1 78.9,144.1 89.2,133.8 98.6,133.8 100.1,135.3 103.1,135.3 105.7,132.7 U?.32@117.503,132.7
BUTTON-2: BALL.6 U?.33 | length 36.6
  Top Layer w0.254: BALL.6@70.344,143.248 71.67,141.922 78.178,141.922 87.6,132.5 101.704,132.5 101.713,132.508 102.178,132.508 U?.33@102.38,132.71
BZ: BZ?.1 U?.4 | length 65
  Bottom Layer w0.254: BZ?.1@95.3,135.2 104.4,135.2 109.2,130.4 109.2,91.6 113.81,86.99 U?.4@117.62,86.99
DISPLAY-SCL: IMU.6 U?.19 | length 44.9
  Top Layer w0.254: IMU.6@65.748,72.156 66.452,72.156 67.796,73.5 72,73.5 75.5,77 78.7,77 93.77,92.07 U?.19@102.38,92.07
DISPLAY-SDA: IMU.1 U?.18 | length 39.5
  Top Layer w0.254: IMU.1@70.326,76.734 72.592,79 77.7,79 93.31,94.61 U?.18@102.38,94.61
ESC-W: ESC.2 U?.5 | length 51.2
  Bottom Layer w0.254: ESC.2@111.78,135.7 110.7,134.62 110.7,93.6 114.7,89.6 117.55,89.6 U?.5@117.62,89.53
ESC-Y: ESC.1 U?.6 | length 47.6
  Bottom Layer w0.254: ESC.1@114.32,135.7 112.3,133.68 112.3,95.8 116.03,92.07 U?.6@117.62,92.07